# Altium PCB Copy of SlipSensorEvalBoard.PcbDoc
Units mm, origin at the board's own origin, x right, y up, seen from the top; angles counter-clockwise.
Board outline 152.4 x 101.6 mm, 2 copper layers (Top Layer, Bottom Layer); 11 components, 7 nets, 24 pads, 8 vias.
Unrouted connection lines stored in the file: 9.
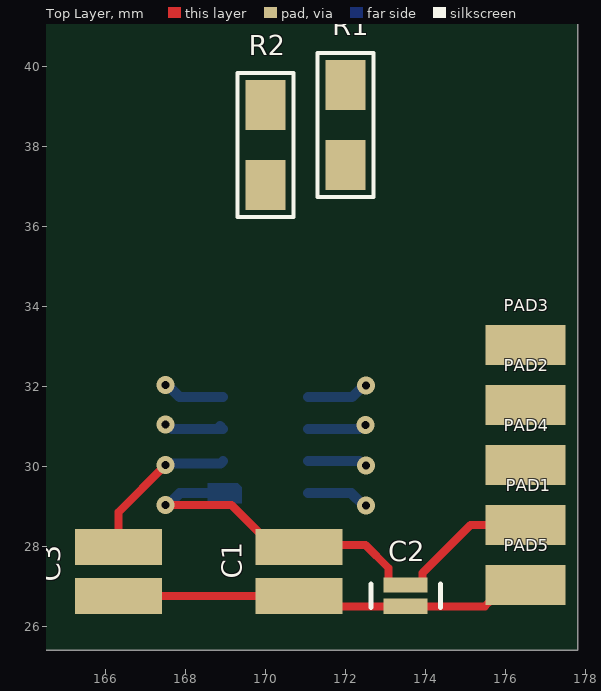
[diagram p0: Top Layer view]
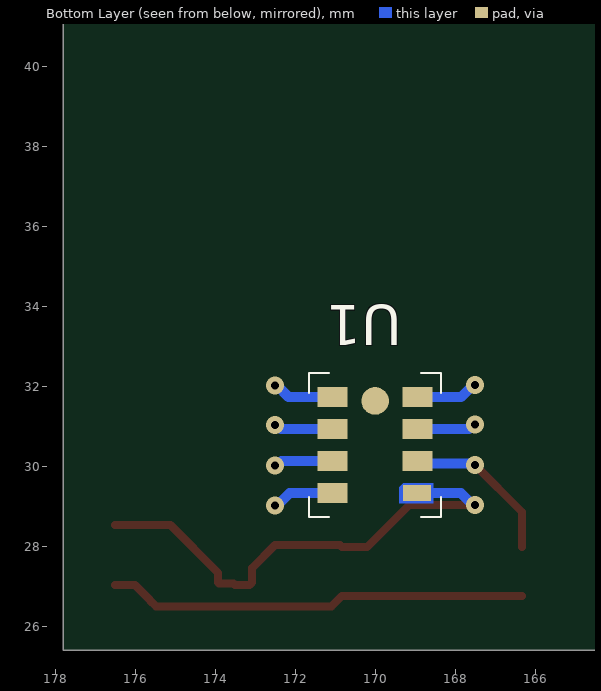
[diagram p1: Bottom Layer view, seen from below]

## Layer stack, top to bottom
Top Solder: solder mask 0.0102, Solder Resist, Dk 3.5
Top Layer: signal copper 0.0356
Dielectric 1: dielectric 0.32, FR-4, Dk 4.8
Bottom Layer: signal copper 0.0356
Bottom Solder: solder mask 0.0102, Solder Resist, Dk 3.5

## Board outline
25.4,25.4 177.8,25.4 177.8,127 25.4,127

## Design rules (kind name [scope] priority, off if disabled: settings)
Clearance [All] p1: gap=0.254 ignorepadtopadclearanceinfootprint=FALSE except(0: Arc-Hole Track-Hole SMDPad-Hole THPad-Hole Via-Hole Fill-Hole Poly-Hole Region-Hole Text-Hole)
PolygonConnect [All] p1: connectstyle=Relief reliefconductorwidth=0.254 reliefentries=4 polygonreliefangle="90 Angle" airgapwidth=0.254
RoomDefinition SlipSensorEvalBoard [InComponentClass('SlipSensorEvalBoard')] p1: confinementstyle=ConfineIn formatcopy=TRUE lockcomponents=FALSE outline 125.3,21.398 187.53,21.398 187.53,41.93 125.3,41.93
RoutingVias [All] p1: holewidth=0.711 width=1.27 viastyle="Through Hole" minholewidth=0.711 minwidth=1.27 maxholewidth=0.711 maxwidth=1.27
SolderMaskExpansion [All] p1: expansion=0.102 istentingtop=FALSE
Width [All] p1: maxlimit=0.254 minlimit=0.254 preferedwidth=0.254
30 further rules are at their usual default settings.

## Components (designator, comment, footprint, x,y, rotation, side; value= is the part's Value field where it differs from the comment)
C1 "10uF" CAP_10UF 170.834,27.37 r90 top
C2 "0.1uF" CAP_0.1UF 173.5,26.765 r90 top
C3 "4.7uF" CAP_4.7UF 166.322,27.37 r90 top
PAD1 "Wirepad" WIREPAD 176.5,28.53 r270 top
PAD2 "Wirepad" WIREPAD 176.5,31.53 r90 top
PAD3 "Wirepad" WIREPAD 176.5,33.03 r90 top
PAD4 "Wirepad" WIREPAD 176.5,30.03 r90 top
PAD5 "Wirepad" WIREPAD 176.5,27.03 r90 top
R1 "0R" OPT_JUMPER 172,38.53 r90 top
R2 "0R" OPT_JUMPER 170,38.03 r90 top
U1 "Optical Navigation Sensor" PAT9125 170,30.53 r90 bottom

## Footprints (in the part's own frame and the unit in brackets; to place one, negate y for a bottom-side part, rotate by r counter-clockwise, add the part's x,y. Pads: shape width x height; smd on the part's side, far side on the other; paste and mask are expansions set on the pad)
CAP_0.1UF [mm]
  rect 0.38x1.1 smd: 1(-0.265,0) 2(0.265,0)
  silkscreen extent -0.29,-0.87 0.29,0.87, body extent -0.26,-0.5 0.26,0.5, height 0.35
CAP_4.7UF [mm]
  rect 0.9x2.17 smd: 1(-0.61,0) 2(0.61,0)
  body extent -0.63,-1 0.63,1, height 0.5
CAP_10UF [mm]
  rect 0.9x2.17 smd: 1(-0.61,0) 2(0.61,0)
  body extent -0.63,-1 0.63,1, height 0.5
OPT_JUMPER [mm]
  rect 1.25x1 smd: 1(-1,0) 2(1,0)
  silkscreen extent -1.8,-0.7 1.8,0.7
PAT9125 [mm] "LGA, 8-Leads, Body 3.50mmx3.20mmx1.00mm, Pitch 0.80mm"
  rect 0.4x0.7 smd paste+0 mask+0: 1(-1.2,-1.05)
  rect 0.5x0.75 smd: 2(-0.4,-1.065) 3(0.4,-1.065) 4(1.2,-1.065) 5(1.2,1.065) 6(0.4,1.065) 7(-0.4,1.065) 8(-1.2,1.065)
  round 0.69 smd: 9(1.105,0)
  Top Layer region: -1.45,-1.45 -0.95,-1.45 -0.95,-0.7 -1.05,-0.6 -1.45,-0.6
  silkscreen extent -1.8,-1.65 1.8,1.65, body extent -1.75,-1.6 1.75,1.6, height 1
WIREPAD [mm] "5mmx3mm SMD pad"
  rect 1x2 smd: 1(0,0)

## Part data
C1: library part cap_10uF, "10µF ±20% 6.3V Ceramic Capacitor X6S 0508 (1220 Metric)", Package="1220 Taiyo Yuden", Category=Capacitors, Category 2="Ceramic Capacitors", Check_prices=https://www.snapeda.com/parts/JWK212C6106MD-T/Taiyo%20Yuden/view-part/924316/?ref=eda, Digi-Key_Part_Number=587-3114-1-ND, MF="Taiyo Yuden", MP=JWK212C6106MD-T, Purchase-URL=https://pricing.snapeda.com/search/part/JWK212C6106MD-T/?ref=eda, SnapEDA_Link=https://www.snapeda.com/parts/JWK212C6106MD-T/Taiyo%20Yuden/view-part/924316/?ref=snap
C2: library part cap_0.1uF, "0.1µF ±20% 6.3V Ceramic Capacitor X7S 0204 (0510 Metric)", Package="0510 Taiyo Yuden", Category=Capacitors, Category 2="Ceramic Capacitors", Check_prices=https://www.snapeda.com/parts/JWK105C7104MP-F/Taiyo%20Yuden/view-part/554958/?ref=eda, Digi-Key_Part_Number=587-2152-1-ND, MF="Taiyo Yuden", MP=JWK105C7104MP-F, Purchase-URL=https://pricing.snapeda.com/search/part/JWK105C7104MP-F/?ref=eda, SnapEDA_Link=https://www.snapeda.com/parts/JWK105C7104MP-F/Taiyo%20Yuden/view-part/554958/?ref=snap
C3: library part cap_4.7uF, "4.7µF ±20% 6.3V Ceramic Capacitor X6S 0508 (1220 Metric)", Package="1220 Taiyo Yuden", Category=Capacitors, Category 2="Ceramic Capacitors", Check_prices=https://www.snapeda.com/parts/JWK212C6475MD-T/Taiyo%20Yuden/view-part/1862133/?ref=eda, Digi-Key_Part_Number=587-6175-1-ND, MF="Taiyo Yuden", MP=JWK212C6475MD-T, Purchase-URL=https://pricing.snapeda.com/search/part/JWK212C6475MD-T/?ref=eda, SnapEDA_Link=https://www.snapeda.com/parts/JWK212C6475MD-T/Taiyo%20Yuden/view-part/1862133/?ref=snap
PAD1 PAD2 PAD3 PAD4 PAD5: "SMD pad to solder a wire straight onto the PCB."
R1 R2: library part opt_jumper
U1: library part PAT9125, "Miniature Optical Navigation Chip", HelpURL=https://www.pixart.com/products-detail/72/PAT9125EL-TKIT___TKMT, Name=PAT9125

## Via types
v1: diameter 0.45, hole 0.2, Top Layer to Bottom Layer, 8 vias

## Nets (pads, with @x,y where several pads share a name; then routed paths per layer and width w, separated by ;. In a path a pad name is that pad's centre, name@x,y a point inside that pad or via, vN(x,y) a via of type N, cw(c..) or ccw(c..) an arc to the next point about the centre after c; other vN are vias at no path point)
CLK: PAD3.1 U1.5 | length 1.6
  Bottom Layer w0.254: U1.5 172.16,31.73 172.45,32.02 v1(172.503,32.02)
DATA: PAD2.1 U1.6 | length 1.5
  Bottom Layer w0.254: U1.6 172.347,30.93 172.447,31.03 v1(172.5,31.03)
GND: C1.1 C2.1 C3.1 PAD5.1 R1.2 U1.4 | length 12.1
  Top Layer w0.2: C3.1 C1.1 171.094,26.5 C2.1 175.478,26.5 175.627,26.649 175.627,26.657 176,27.03 PAD5.1
  Bottom Layer w0.254: v1(167.5,32.03) 167.553,32.03 167.853,31.73 U1.4
ID_SEL: R1.1 R2.1 U1.8 | length 1.6
  Bottom Layer w0.254: U1.8 172.14,29.33 172.45,29.02 v1(172.503,29.02)
MOT: PAD4.1 U1.7 | length 1.5
  Bottom Layer w0.254: U1.7 172.34,30.13 172.45,30.02 v1(172.503,30.02)
NetC3_2: C3.2 U1.2 | length 4
  Top Layer w0.2: C3.2 166.322,28.852 v1(167.5,30.03)
  Bottom Layer w0.254: v1(167.5,30.03) 167.538,30.068 168.873,30.068 U1.2
VCC: C1.2 C2.2 PAD1.1 R2.2 U1.1 U1.3 | length 14
  Top Layer w0.2: v1(167.5,29.03) 169.149,29.03 170.199,27.98 C1.2 170.884,28.03 172.5,28.03 173.077,27.453 173.077,27.093 173.14,27.03 C2.2 ; C2.2@173.541,27.071 173.901,27.071 173.923,27.093 173.923,27.334 175.119,28.53 PAD1.1
  Bottom Layer w0.254: v1(167.5,29.03) 167.553,29.03 167.853,29.33 U1.1 ; v1@167.535,31.003 v1(167.497,31.04) 167.55,31.04 167.66,30.93 U1.3 U1.3@168.862,31.003
pads on no net: U1.9

## Dimensions
183.7,9.9 to 168.7,9.9 on Top Layer
183.7,10.9 to 183.7,20.9 on Top Layer